# Altium PCB UKU100.PcbDoc (part 1 of 2)
Units mm, origin at the board's own origin, x right, y up, seen from the top; angles counter-clockwise.
Board outline 319.2 x 161.95 mm, 2 copper layers (Top Layer, Bottom Layer); 207 components, 325 nets, 756 pads, 514 vias.
Unrouted connection lines stored in the file: 5.
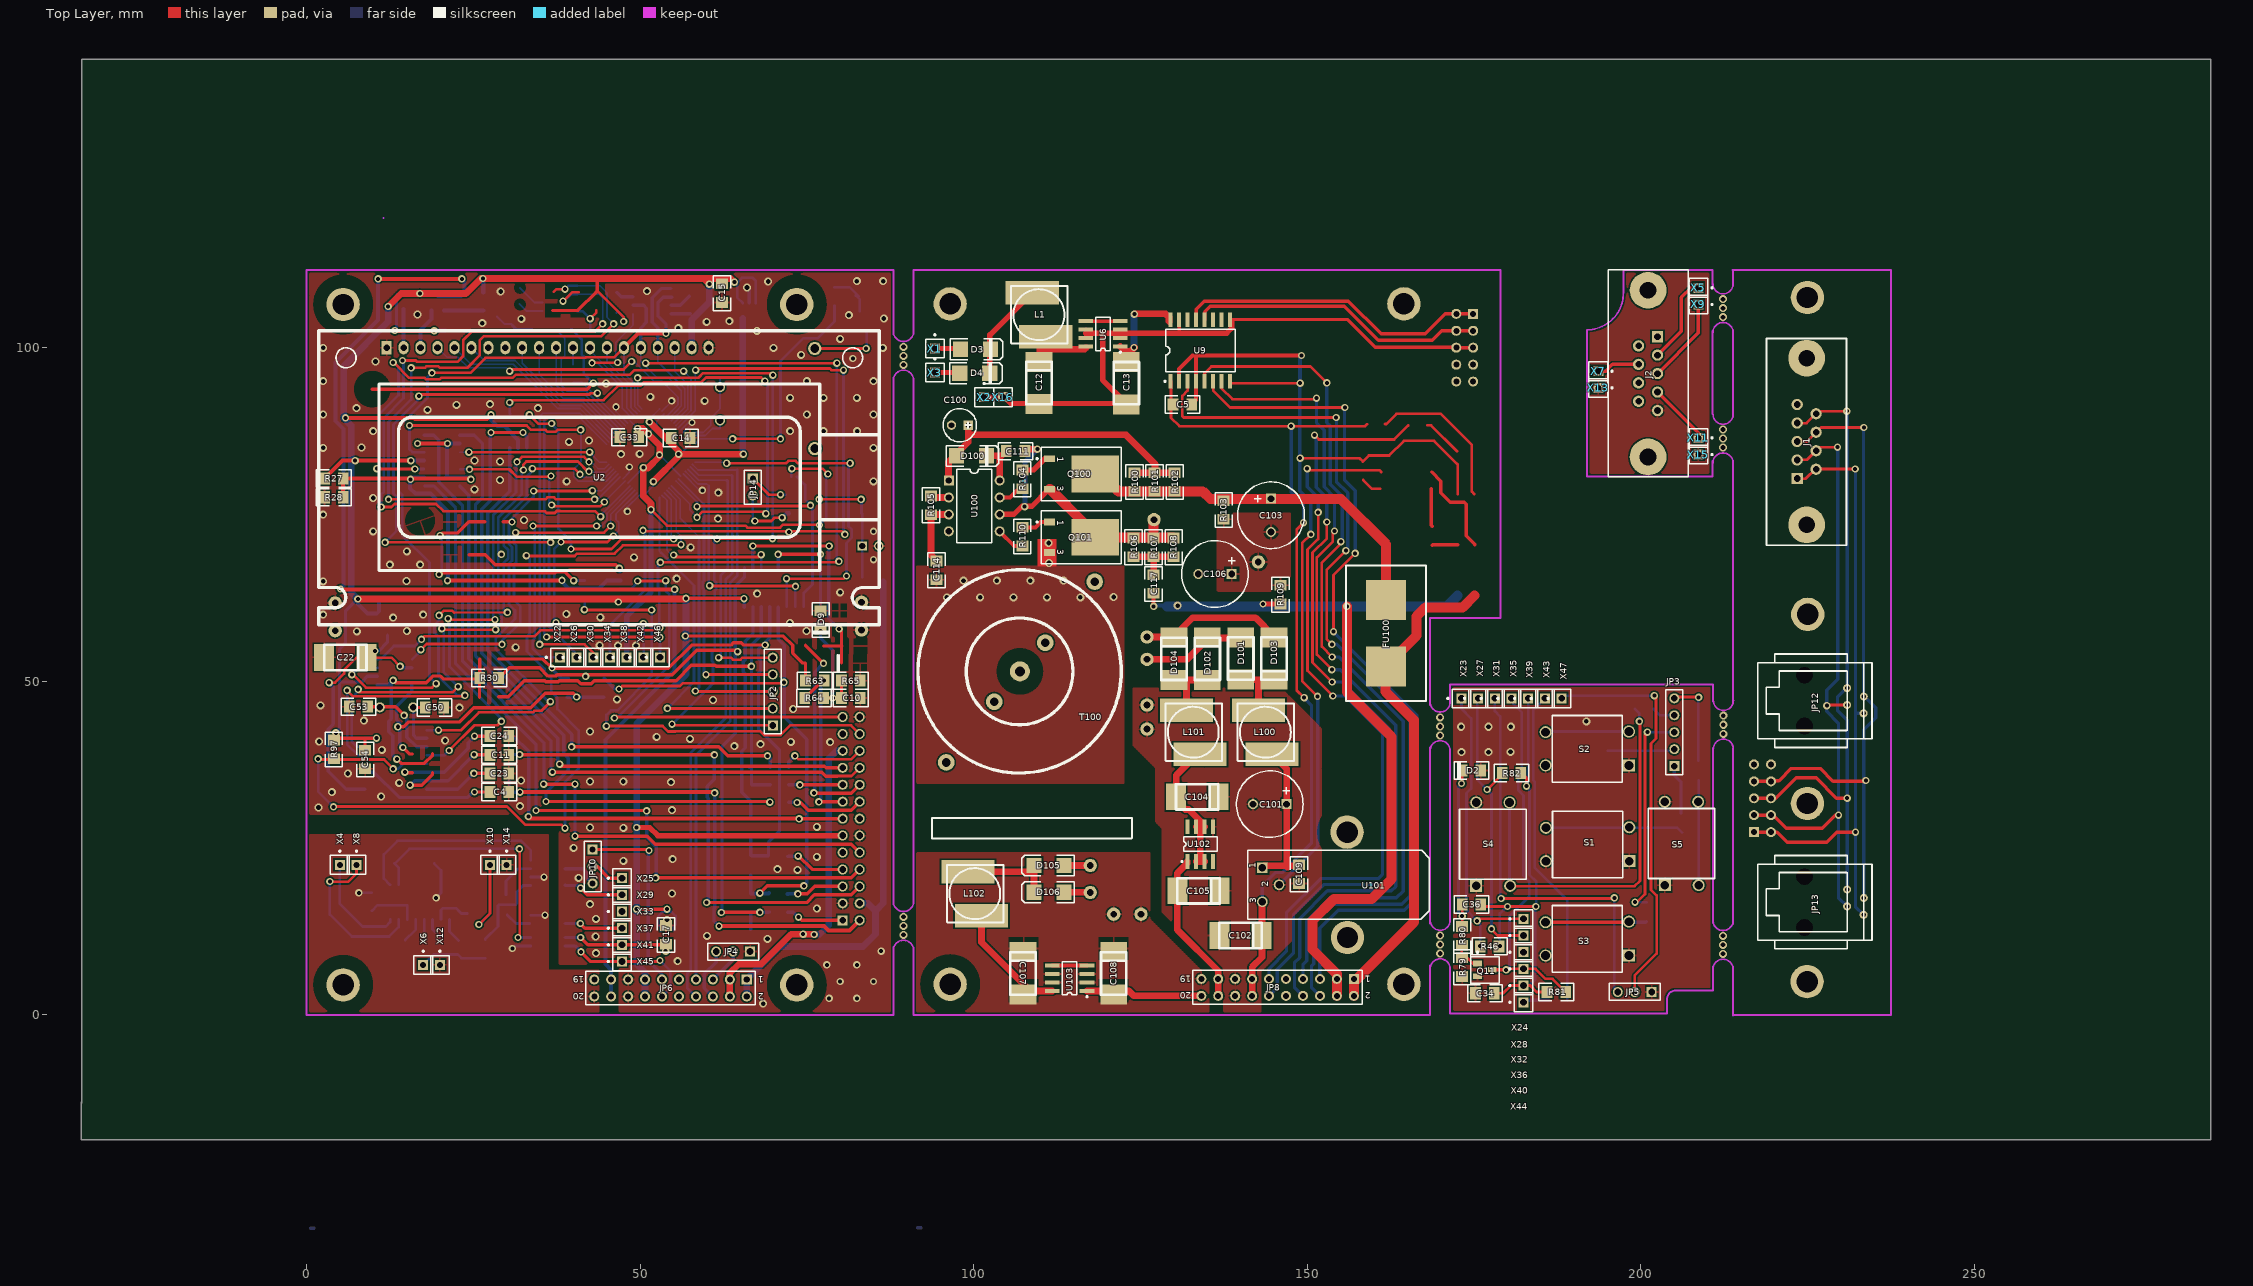
[diagram p0: Top Layer view]
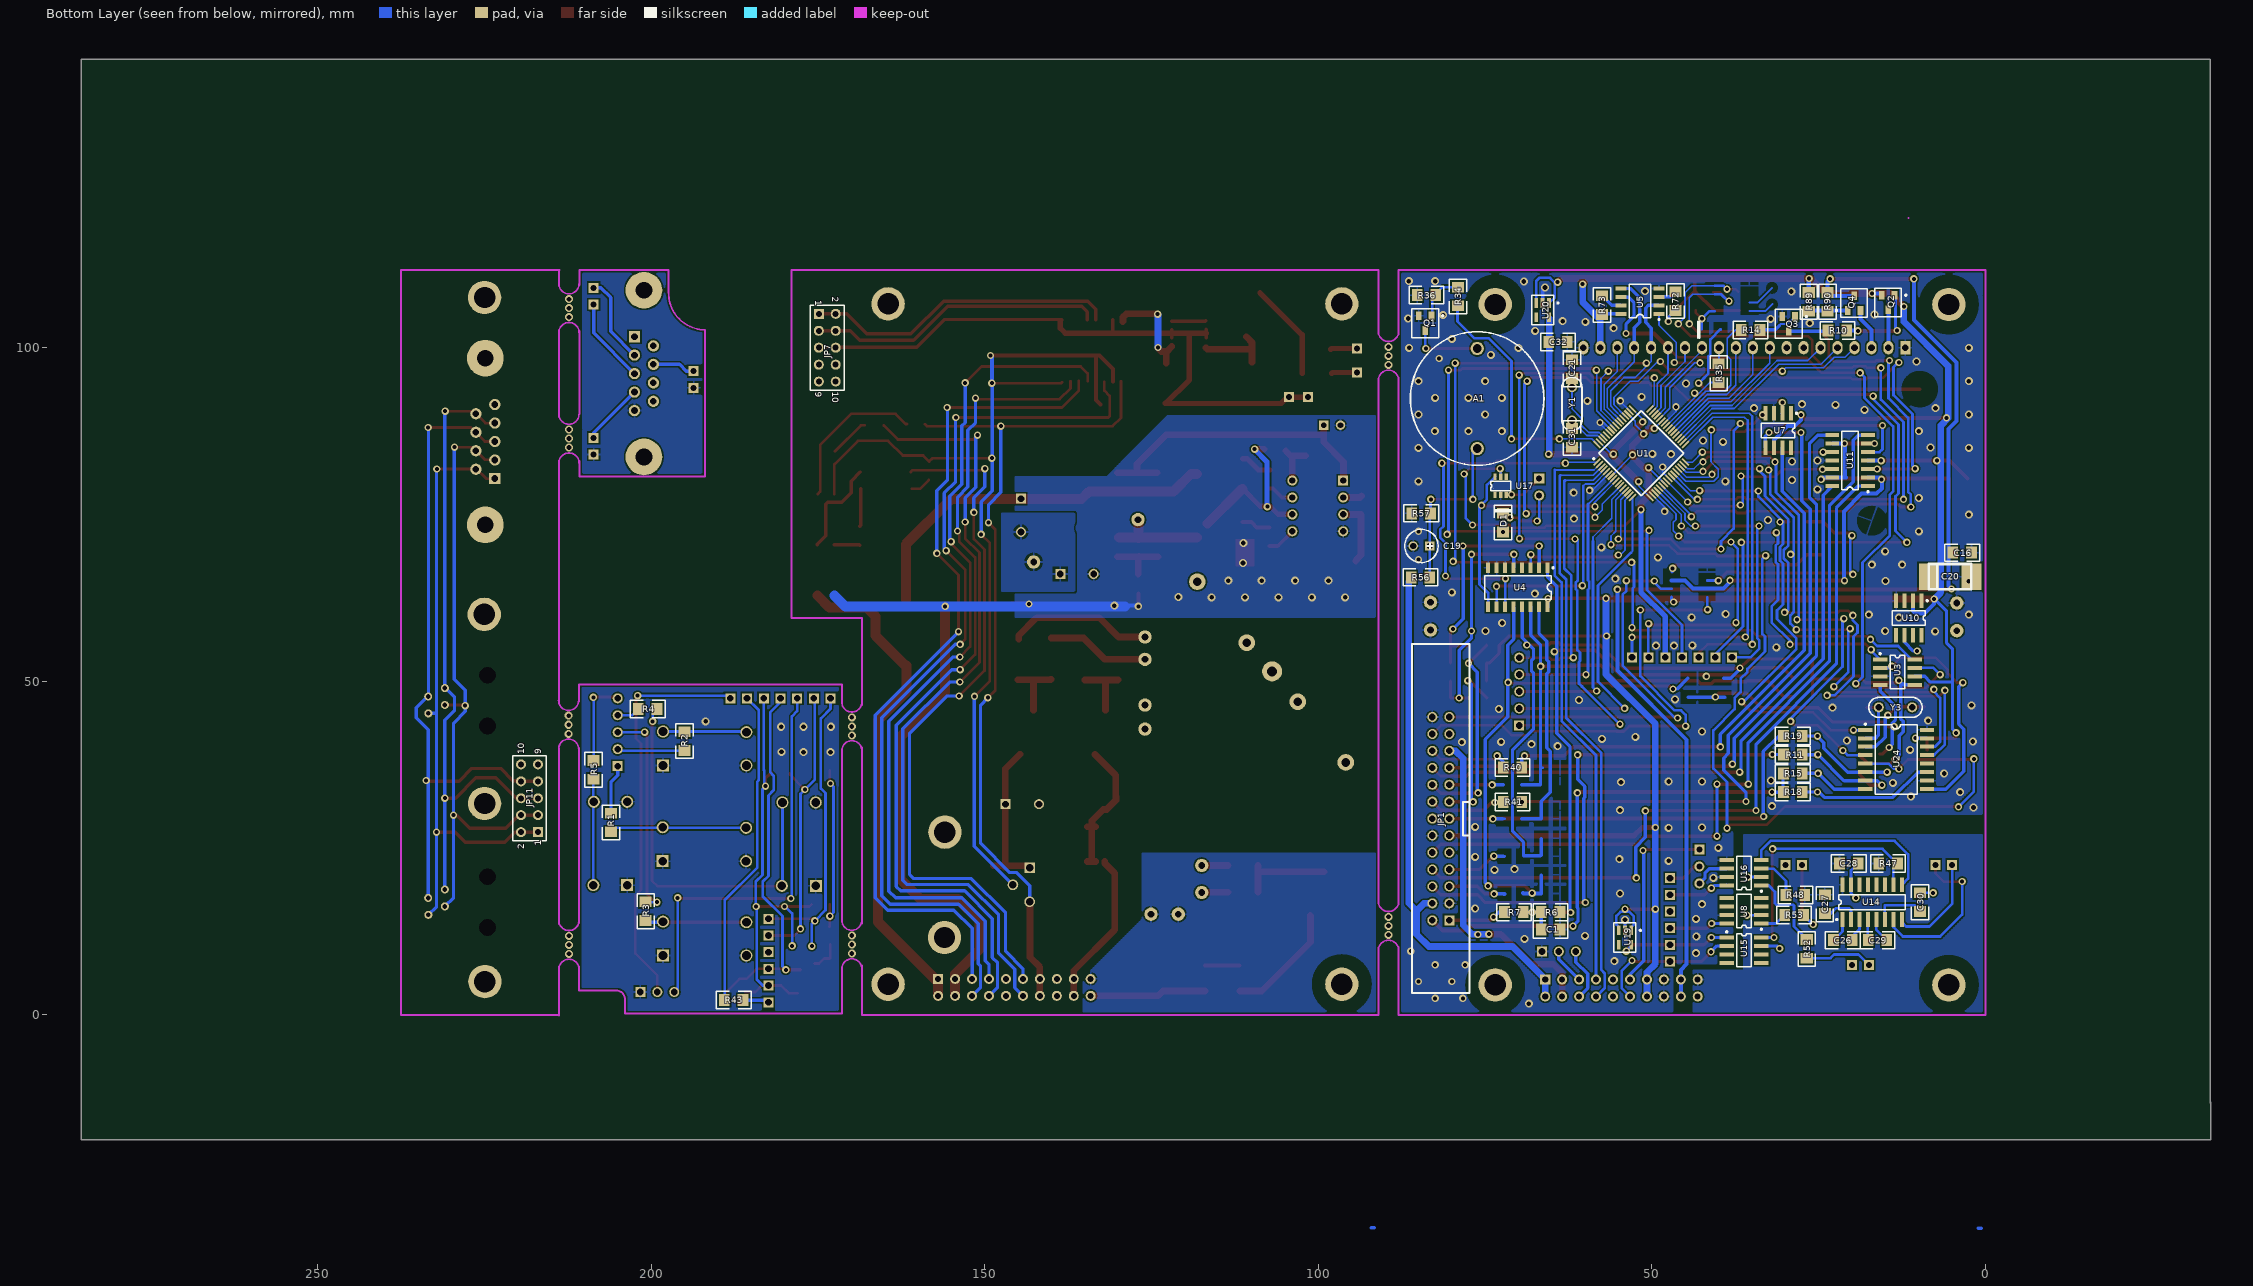
[diagram p1: Bottom Layer view, seen from below]

## Layer stack, top to bottom
Top Layer: signal copper 0.0356
Dielectric: dielectric 0.32, FR-4, Dk 4.8
Bottom Layer: signal copper 0.0356

## Board outline
-33.65,-13.25 -33.65,143.25 285.45,143.25 285.45,-18.7 -33.75,-18.7 -33.75,-13

## Design rules (kind name [scope] priority, off if disabled: settings)
Clearance Holes [InPoly vs HasPad('Free-0')] p1: gap=2
Clearance "Для LPC" [InComponent(U1)or
InNet(NetC21_2)or
InNet(NetC31_2)or
InNet(P0_0)or
InNet(P0_1)or
InNet(P0_2)or
InNet(P0_3)or
InNet(P0_4)or
InNet(P0_5)or
InNet(P0_6)or
InNet(P0_7)or
InNet(P0_8)or
InNet(P0_9)or
InNet(P0_10)or
InNet(P0_11)or
InNet(P0_12)or
InNet(P0_13)or
InNet(P0_14)or
InNet(P0_15)or
InNet(P0_16)or
InNet(P0_17)or
InNet(P0_18)or
InNet(P0_19)or
InNet(P0_20)or
InNet(P0_21)    or
InNet(P0_22)    or
InNet(P0_23)    or
InNet(P0_24)    or
InNet(P0_25)    or
InNet(P0_27)    or
InNet(P0_28)    or
InNet(P0_29)    or
InNet(P0_30)    or
InNet(P1_16)    or
InNet(P1_17)    or
InNet(P1_18)    or
InNet(P1_19)    or
InNet(P1_20)    or
InNet(P1_21)    or
InNet(P1_22)    or
InNet(P1_23)    or
InNet(P1_24)    or
InNet(P1_25)    or
InNet(P1_26)    or
InNet(P1_27)    or
InNet(P1_29)    or
InNet(P1_30)    or
InNet(P1_31)    or
InNet('+1V8')   or
InNet('+3V3')   or
(InNet(GND)and(not InPoly))      or
InNet(RES) vs InComponent(U1)or
InNet(NetC21_2)or
InNet(NetC31_2)or
InNet(P0_0)or
InNet(P0_1)or
InNet(P0_2)or
InNet(P0_3)or
InNet(P0_4)or
InNet(P0_5)or
InNet(P0_6)or
InNet(P0_7)or
InNet(P0_8)or
InNet(P0_9)or
InNet(P0_10)or
InNet(P0_11)or
InNet(P0_12)or
InNet(P0_13)or
InNet(P0_14)or
InNet(P0_15)or
InNet(P0_16)or
InNet(P0_17)or
InNet(P0_18)or
InNet(P0_19)or
InNet(P0_20)or
InNet(P0_21)    or
InNet(P0_22)    or
InNet(P0_23)    or
InNet(P0_24)    or
InNet(P0_25)    or
InNet(P0_27)    or
InNet(P0_28)    or
InNet(P0_29)    or
InNet(P0_30)    or
InNet(P1_16)    or
InNet(P1_17)    or
InNet(P1_18)    or
InNet(P1_19)    or
InNet(P1_20)    or
InNet(P1_21)    or
InNet(P1_22)    or
InNet(P1_23)    or
InNet(P1_24)    or
InNet(P1_25)    or
InNet(P1_26)    or
InNet(P1_27)    or
InNet(P1_29)    or
InNet(P1_30)    or
InNet(P1_31)    or
InNet('+1V8')   or
InNet('+3V3')   or
(InNet(GND)and(not InPoly))      or
InNet(RES)] p2: gap=0.1
Clearance [All] p3: gap=0.25
Clearance "Для разъёма и индикатора" [InComponent(JP1) or InComponent(U2)] p4: gap=0.3
Clearance Высоковольтное [InNet('+UOUT') or
InNet('U1') or
InNet('U2') or
InNet('UAKB') or
InNet('-UOUT') vs InPoly] p5: gap=0.6
Clearance Poly [InPoly] p6: gap=0.4
Clearance Poly_Poly [InPoly vs InPoly] p7: gap=1
Clearance Keep_Out [OnLayer('Keep-Out Layer')] p8: gap=0.7
ComponentClearance [All] p1: gap=0.254 collisioncheckmode=0
HoleSize [All] p1: absolutevalues=TRUE maxlimit=5 minlimit=0.025 maxpercent=80.000 minpercent=20.000
PolygonConnect [All] p1: connectstyle=Relief reliefconductorwidth=0.25 reliefentries=4 polygonreliefangle="90 Angle"
RoutingLayers [All] p1: top layer=Horizontal bottom layer=Vertical
RoutingVias [All] p1: holewidth=0.6 width=1.1 viastyle="Through Hole" minholewidth=0.6 minwidth=1.1 maxholewidth=0.7 maxwidth=1.2
SolderMaskExpansion [All] p1: expansion=0.102
TestPointUsage [All] p1: valid=0 allowmultiple=FALSE
Testpoint [All] p1: side=15 testpointundercomponent=TRUE minsize=1.016 maxsize=2.54 preferedsize=1.524 minholesize=0 maxholesize=1.016 preferedholesize=0.813 testpointgrid=0.025 style=1023 order=1234567890
Width [All] p1: maxlimit=2 minlimit=0.2 preferedwidth=0.254 toplayer_prefwidth=0.4 bottomlayer_prefwidth=0.5 minimp=50.000000 maximp=50.000000 favimp=50.000000
15 further rules are at their usual default settings.

## Classes and differential pairs
component class IBPV11: -IAKB A1 AIN3 AIN4 AIN4U AIN5 C0 C1 C4 C10 C11 C14 C15 C16 C17 C19 C20 C21 C22 C23 C24 C31 C32 C33 C34 C36 C50 C53 C54 D2 D9 I1+ I1- JP1 JP2 JP3 JP4 JP5 JP6 JP10 NetC25_1 NetC29_1 NetC29_2 NetC30_1 P0_19 Q1 Q2 Q3 Q4 Q11 R1 R2 R3 R4 R5 R6 R7 R10 R11 R14 R15 R18 R19 R34 R35 R36 R40 R41 R43 R46 R56 R57 R63 R64 R65 R79 R80 R81 R82 R89 R90 R97 S1 S2 S3 S4 S5 U1 U2 U4 U7 U10 U19 U20 U24 X22 X23 X24 X25 X26 X27 X28 X29 X30 X31 X32 X33 X34 X35 X36 X37 X38 X39 X40 X41 X42 X43 X44 X45 X46 X47 Y1 Y3
component class Designator: C5 C12 C13 C100 C101 C102 C103 C104 C105 C106 C107 C108 C109 C111 C114 C117 D3 D4 D100 D101 D102 D103 D104 D105 D106 FU100 J1 J4 JP7 JP8 JP11 JP12 JP13 L1 L100 L101 L102 Q100 Q101 R100 R101 R102 R103 R104 R105 R106 R107 R108 R109 R110 T100 U6 U9 U100 U101 U102 U103 X1 X2 X3 X16

## Components (designator, comment, footprint, x,y, rotation, side; value= is the part's Value field where it differs from the comment)
A1 "EFM-260" Pjezo15 76.2,97.4 r270 bottom
C1 "1.0" C3216-1206#1 65.2,12.8 r180 bottom (schematic designator C4)
C4 "1.0" _1206#1 28.9,33.4 r180 top
C5 "1.0" C3216-1206#1 131.3,91.5 r0 top (schematic designator C?)
C10 "1.0" C3216-1206#1 81.6,47.5 r0 top
C11 "1.0" C3216-1206#1 28.9,39 r180 top (schematic designator C?)
C12 "10.0x25 tantal" CAP_EL_6_3#1 109.8,97.9 r270 top (schematic designator C?)
C13 "10.0x25 tantal" CAP_EL_6_3#2 122.9,97.9 r270 top (schematic designator C?)
C14 "0.1" C3216-1206#1 56.1,86.5 r180 top
C15 "0.1" C3216-1206#2 62.3,108.2 r90 top
C16 "0.1" C3216-1206#2 3.5,69.3 r0 bottom
C17 "0.1" C3216-1206#1 53.9,12 r270 top
C19 "22.0x50" el3#1 83.3,70.3 r0 bottom
C20 "10.0x25 tantal" cap_el_6_3#1 8.5,65.7 r180 bottom (schematic designator C8)
C21 "15pF" C3216-1206#1 62,96.8 r270 bottom
C22 "10.0x25 tantal" cap_el_6_3#2 9,53.6 r180 top
C23 "1.0" C3216-1206#1 28.9,36.2 r180 top (schematic designator C?)
C24 "1.0" C3216-1206#1 28.9,41.8 r180 top
C26 "1.0" C3216-1206#1 21.4,11.2 r0 bottom (schematic designator C27)
C27 "1.0" _1206#2 24.1,16.6 r90 bottom (schematic designator C23)
C28 "1.0" C3216-1206#1 20.5,22.7 r180 bottom (schematic designator C24)
C29 "1.0" C3216-1206#1 16.2,11.2 r180 bottom (schematic designator C25)
C30 "1.0" C3216-1206#1 9.8,16.9 r90 bottom (schematic designator C26)
C31 "15pF" C3216-1206#1 62,86.5 r90 bottom
C32 "0.1" C3216-1206#1 64.1,100.9 r0 bottom
C33 "0.1" C3216-1206#2 48.4,86.6 r0 top
C34 "1.0" C3216-1206#1 176.65,3.25 r0 top
C36 "1.0" C3216-1206#1 174.65,16.55 r0 top
C50 "15pF" _1206#3 19.2,46.1 r180 top
C53 "15pF" _1206#3 7.8,46.2 r0 top
C54 "1.0" C3216-1206#1 8.8,38.3 r90 top
C100 "22.0x50" el3#2 99.2,88.4 r180 top (schematic designator C?)
C101 "220.0x25" el5 141.9,31.6 r0 top (schematic designator C1)
C102 "10.0x25 tantal" CAP_EL_6_3#3 143.2,11.9 r180 top (schematic designator C2)
C103 "220.0x63" el5 144.6,72.4 r90 top (schematic designator C?)
C104 "10.0x25 tantal" CAP_EL_6_3#3 136.7,32.7 r180 top (schematic designator C4)
C105 "10.0x25 tantal" CAP_EL_6_3#3 136.9,18.6 r180 top (schematic designator C5)
C106 "220.0x63" el5 133.7,66.1 r0 top (schematic designator C?)
C107 "10.0x25 tantal" CAP_EL_6_3#3 107.4,9.4 r270 top (schematic designator C8)
C108 "10.0x25 tantal" CAP_EL_6_3#3 121,9.4 r270 top (schematic designator C9)
C109 "0.1" C3216-1206#1 148.8,21.1 r90 top (schematic designator C10)
C111 "0.1" C3216-1206#1 106.3,84.5 r0 top (schematic designator C12)
C114 "1n0x1000" C3216-1206#1 94.45,66.65 r270 top (schematic designator C15)
C117 "1n0x1000" C3216-1206#1 127,64.6 r270 top (schematic designator C18)
D1 "LL4148" _1206D 72.3,73.8 r270 bottom
D2 "LL4148" _1206d#1 174.65,36.65 r0 top
D3 "10BQ060" DSO-C2/X2.3 100.3,99.8 r0 top (schematic designator D?)
D4 "10BQ060" DSO-C2/X2.3 100.2,96.2 r0 top (schematic designator D?)
D9 "BZV55-C5V6" _1206d#2 77.1,59.2 r90 top
D100 "10BQ060" DSO-C2/X2.3 99.7,83.8 r0 top (schematic designator D3)
D101 "10BQ060" D_6_3 140.05,50.25 r90 top (schematic designator D1)
D102 "10BQ060" D_6_3 135.05,56.55 r270 top (schematic designator D2)
D103 "10BQ060" D_6_3 145.05,50.25 r90 top (schematic designator D4)
D104 "10BQ060" D_6_3 130.05,56.55 r270 top (schematic designator D5)
D105 "10BQ060" DSO-C2/X2.3 111.3,22.4 r180 top (schematic designator D6)
D106 "10BQ060" DSO-C2/X2.3 111.3,18.4 r180 top (schematic designator D7)
FU100 "5.0A" FUSE2 161.8,57.2 r90 top (schematic designator FU1)
J1 "DBS-9M" DSUB_N9 223.35,85.9 r90 top
J2 "DBS-9M" DSUB_N9 202.65,96.2 r270 top (schematic designator J1)
JP1 "IDC-26" SCM-26 81.6,29.4 r90 bottom (schematic designator JP?)
JP2 "PLS-5" HDR1X5 69.9,43.4 r90 top (schematic designator JP3)
JP3 "PLS-5" HDR1X5 205.05,37.3 r90 top (schematic designator JP2)
JP4 "PLS-3" HDR1X3#1 66.5,9.5 r180 top (schematic designator JP?)
JP5 "PLS-3" HDR1X3#1 201.65,3.45 r180 top (schematic designator JP?)
JP6 "PBD20" HDR2X10 66,5.3 r180 top (schematic designator JP?)
JP7 "IDC10" HDR2X5 174.9,105.1 r270 bottom (schematic designator JP?)
JP8 "PLHD20" HDR2X10 157,5.4 r180 top
JP10 "PLS-3" HDR1X3#2 42.9,24.8 r270 top
JP11 "IDC10" HDR2X5 217,27.4 r90 bottom
JP12 "TJ3-4P4C" tj3-4p4c 233.45,47.1 r90 top
JP13 "TJ3-4P4C" tj3-4p4c 233.45,16.9 r90 top
JP14 "PLS-2" HDR1X2 66.9,80.4 r270 top
L1 "SDR0805-390KL" L10x10 104.7,99.9 r0 top (schematic designator L?)
L100 "SDR0805-390KL" L10X10 138.65,37.3 r0 top (schematic designator L1)
L101 "SDR0805-390KL" L10X10 127.85,37.3 r0 top (schematic designator L2)
L102 "SDR0805-390KL" L10X10 95.1,13.1 r0 top (schematic designator L3)
Q1 "BC846" SO-G3#1 84,103.7 r0 bottom
Q2 "BC856" SO-G3#2 14.6,106.8 r0 bottom
Q3 "BC846" SO-G3#2 29.5,103.6 r0 bottom
Q4 "BC856" SO-G3#1 19.7,106.7 r180 bottom
Q11 "BC846" SO-G3#1 176.65,6.75 r270 top
Q100 "IRFR120" SIP-G3/E8 114.8,81.1 r270 top (schematic designator Q?)
Q101 "IRFR120" SIP-G3/E8 114.8,71.6 r270 top (schematic designator Q?)
R1 "2K7" _1206#2 206.05,28.85 r90 bottom (schematic designator R3)
R2 "2K7" _1206#2 195.05,41.05 r270 bottom (schematic designator R4)
R3 "2K7" _1206#2 200.85,15.55 r90 bottom (schematic designator R6)
R4 "2K7" _1206#2 200.55,45.85 r0 bottom (schematic designator R7)
R5 "2K7" _1206#2 208.65,36.75 r90 bottom (schematic designator R9)
R6 "2K7" _1206#2 65.2,15.4 r180 bottom (schematic designator R10)
R7 "33K" _1206#2 70.7,15.4 r0 bottom (schematic designator R11)
R10 "1K0" _1206#1 22.2,102.6 r180 bottom
R11 "K10" _1206#1 28.9,39 r0 bottom (schematic designator R?)
R14 "1K0" _1206#1 35.2,102.7 r180 bottom
R15 "K10" _1206#1 28.9,36.2 r0 bottom (schematic designator R?)
R18 "K10" _1206#1 28.9,33.4 r0 bottom
R19 "K10" _1206#1 28.9,41.8 r0 bottom
R27 "2K7" _1206#3 4.1,80.4 r0 top
R28 "1K0" _1206#3 4.1,77.6 r0 top
R30 "10R" _1206#3 27.4,50.5 r180 top
R34 "1K0" _1206#2 79.1,107.7 r90 bottom (schematic designator R36)
R35 "10K" _1206#2 40,96.2 r90 bottom
R36 "10K" _1206#2 83.8,107.9 r180 bottom (schematic designator R16)
R40 "K10" _1206#2 70.9,37.1 r180 bottom (schematic designator R42)
R41 "K10" _1206#2 70.9,31.9 r180 bottom (schematic designator R20)
R43 "K20" _1206#2 187.65,2.25 r180 bottom (schematic designator R42)
R46 "1K0" _1206#4 177.4,10.3 r0 top
R47 "1K0" _1206#2 14.6,22.7 r180 bottom (schematic designator R65)
R48 "K20" _1206#2 28.5,18 r180 bottom (schematic designator R45)
R52 "1K0" _1206#2 26.8,9.9 r270 bottom (schematic designator R67)
R53 "1K0" _1206#2 28.7,15 r180 bottom (schematic designator R68)
R56 "10K" _1206#2 84.7,65.6 r0 bottom
R57 "2K7" _1206#2 84.6,75.2 r180 bottom
R63 "1K0" _1206#3 76.2,50.1 r180 top
R64 "2K7" _1206#3 76.1,47.5 r0 top
R65 "10K" _1206#3 81.6,50.1 r180 top
R72 "2K7" _1206#2 46.5,107 r270 bottom
R73 "2K7" _1206#2 57.5,106.4 r90 bottom
R79 "10K" _1206#2 173.25,7.15 r90 top
R80 "10K" _1206#2 173.25,11.85 r90 top
R81 "10K" _1206#2 187.35,3.45 r0 top (schematic designator R?)
R82 "10K" _1206#2 180.65,36.25 r180 top
R89 "7K5" _1206#2 26.5,106.9 r90 bottom
R90 "2K2" _1206#2 23.7,106.9 r270 bottom
R97 "1K0" _1206#3 4.1,39.8 r90 top
R100 "7K5" _1206#2 124.149,79.9 r90 top (schematic designator R1)
R101 "7K5" _1206#2 127.15,79.9 r90 top (schematic designator R2)
R102 "7K5" _1206#2 130.15,79.9 r90 top (schematic designator R3)
R103 "20K" _1206#2 137.5,75.7 r270 top (schematic designator R4)
R104 "22R" _1206#2 107.3,80.3 r90 top (schematic designator R5)
R105 "15K" _1206#2 93.6,76.4 r90 top (schematic designator R6)
R106 "30R" _1206#2 124,70.1 r270 top (schematic designator R9)
R107 "30R" _1206#2 127,70.1 r270 top (schematic designator R8)
R108 "30R" _1206#2 130,70.1 r270 top (schematic designator R7)
R109 "20K" _1206#2 146,63 r270 top (schematic designator R10)
R110 "22R" _1206#2 107.3,71.7 r90 top (schematic designator R11)
S1 "SWT-9" SWT-9 198.3,23.05 r180 top
S2 "SWT-9" SWT-9 198.25,37.4 r180 top
S3 "SWT-9" SWT-9 198.25,8.9 r180 top
S4 "SWT-9" SWT-9 175.35,19.35 r90 top
S5 "SWT-9" SWT-9 203.62,19.45 r90 top
T100 "TRANS_RING1" trans_ring1 106.9,51.5 r180 top (schematic designator T1)
U1 "LPC2129FBD64" F-QFP10X10-G64/P.5N 51.6,84.2 r135 bottom
U2 "AG1232G" AG1232G 43.9,80.6 r0 top (schematic designator U4)
U3 "TLV2542" SO-G8 13.2,51.4 r270 bottom (schematic designator U6)
U4 "MC14051BD" SO-G16/C5.85 70.1,64.1 r0 bottom
U5 "25LC640" SO-G8/D5 51.8,107 r90 bottom
U6 "MC78L05ACD" SO-G8 119.4,102.1 r90 top (schematic designator U?)
U7 "UCC37324" SO-G8 31.1,87.6 r0 bottom
U8 "MOCD217" SO-G8 36.2,15.6 r90 bottom
U9 "ADM2483" SO-G16/D10.4 134,99.6 r0 top (schematic designator U?)
U10 "REF198GS" SO-G8 11.5,59.5 r0 bottom
U11 "LM324AD" SO-G14/G3.3 20.3,83.1 r90 bottom
U14 "MAX232ESE" SO-G16 17,16.9 r180 bottom
U15 "MOCD217" SO-G8 36.2,9.7 r270 bottom
U16 "MOCD217" SO-G8 36.2,21.3 r90 bottom
U17 "PIC10F200/202" "SOT23 - 6" 72.7,79.3 r180 bottom
U19 "TPS76333" SO-G5/P.95 54.05,11.6 r0 bottom
U20 "TPS76318" SO-G5/P.95 66.4,105.65 r0 bottom
U24 "AD7705" SO-G16/D10.4 13.4,38.3 r270 bottom
U100 "IR2155" DIP-8/D11 100.1,76.3 r270 top (schematic designator U?)
U101 "7805" 7805_1 143.3,19.5 r270 top (schematic designator U1)
U102 "L79L05ACD" SO-G8 134,25.6 r0 top (schematic designator U3)
U103 "MC78L05ACD" SO-G8 114.4,5.5 r90 top (schematic designator U4)
X1 "" PIN1#1 94.2,99.9 r0 top (schematic designator X?)
X2 "" PIN1#1 101.6,92.6 r0 top (schematic designator X?)
X3 "" PIN1#1 94.2,96.3 r0 top (schematic designator X?)
X4 "" PIN1#1 5,22.5 r0 top (schematic designator X?)
X5 "" PIN1#1 208.65,109 r270 top (schematic designator X?)
X6 "" PIN1#1 17.5,7.5 r0 top (schematic designator X?)
X7 "" PIN1#1 193.65,96.5 r270 top (schematic designator X?)
X8 "" PIN1#1 7.5,22.5 r0 top (schematic designator X?)
X9 "" PIN1#1 208.65,106.5 r270 top (schematic designator X?)
X10 "" PIN1#1 27.5,22.5 r0 top (schematic designator X?)
X11 "" PIN1#1 208.65,86.5 r270 top (schematic designator X?)
X12 "" PIN1#1 20,7.5 r0 top (schematic designator X?)
X13 "" PIN1#1 193.65,94 r270 top (schematic designator X?)
X14 "" PIN1#1 30,22.5 r0 top
X15 "" PIN1#1 208.65,84 r270 top
X16 "" PIN1#1 104.4,92.6 r90 top
X22 "" PIN1#2 38,53.6 r90 top
X23 "" PIN1#2 173.15,47.45 r90 top
X24 "" PIN1#2 182.45,14.4 r90 top
X25 "" PIN1#2 47.3,20.5 r90 top
X26 "" PIN1#2 40.5,53.6 r90 top
X27 "" PIN1#2 175.65,47.45 r90 top
X28 "" PIN1#2 182.45,11.9 r90 top
X29 "" PIN1#2 47.3,18 r90 top
X30 "" PIN1#2 43,53.6 r90 top
X31 "" PIN1#2 178.15,47.45 r90 top
X32 "" PIN1#2 182.45,9.4 r90 top
X33 "" PIN1#2 47.3,15.5 r90 top
X34 "" PIN1#2 45.5,53.6 r90 top
X35 "" PIN1#2 180.65,47.45 r90 top
X36 "" PIN1#2 182.45,6.9 r90 top
X37 "" PIN1#2 47.3,13 r90 top
X38 "" PIN1#2 48,53.6 r90 top
X39 "" PIN1#2 183.15,47.45 r90 top
X40 "" PIN1#2 182.45,4.4 r90 top
X41 "" PIN1#2 47.3,10.5 r90 top
X42 "" PIN1#2 50.5,53.6 r90 top
X43 "" PIN1#2 185.65,47.45 r90 top
X44 "" PIN1#2 182.45,1.9 r90 top
X45 "" PIN1#2 47.3,8 r90 top
X46 "" PIN1#2 53,53.6 r90 top
X47 "" PIN1#2 188.15,47.45 r90 top
Y1 "10MGz" QWARZ1#1 62,94.1 r270 bottom
Y3 "4,9152MGz" QWARZ1#2 16,46.1 r180 bottom (schematic designator Y?)

## Footprints (in the part's own frame and the unit in brackets; to place one, negate y for a bottom-side part, rotate by r counter-clockwise, add the part's x,y. Pads: shape width x height; smd on the part's side, far side on the other; paste and mask are expansions set on the pad)
7805_1 [mm]
  rect 1.6x1.6 hole 1.1: 1(-2.54,0)
  round 1.6 hole 1.1: 2(0,2.5) 3(2.54,0)
  silkscreen extent -5.15,-2.2 5.15,25
_1206#1 [mm]
  rect 1.6x1.8 smd: 1(-1.412,-0.007) 2(1.388,-0.007)
  silkscreen extent -2.61,-1.31 2.59,1.29
_1206#2 [mm]
  rect 1.6x1.8 smd: 1(-1.4,0) 2(1.4,0)
  silkscreen extent -2.6,-1.3 2.6,1.3
_1206#3 [mm]
  rect 1.6x1.8 smd: 1(-1.397,0.003) 2(1.403,0.003)
  silkscreen extent -2.6,-1.3 2.6,1.3
_1206#4 [mm]
  rect 1.6x1.8 smd: 1(-1.421,-0.006) 2(1.379,-0.006)
  silkscreen extent -2.62,-1.31 2.58,1.29
_1206D [mm]
  rect 1.6x1.8 smd: 1(1.395,-0.009) 2(-1.405,-0.009)
  silkscreen extent -2.6,-1.31 2.6,1.29
_1206d#1 [mm]
  rect 1.6x1.8 smd: 1(1.4,0) 2(-1.4,0)
  silkscreen extent -2.6,-1.3 2.6,1.3
_1206d#2 [mm]
  rect 1.6x1.8 smd: 1(1.405,0.012) 2(-1.395,0.012)
  silkscreen extent -2.6,-1.29 2.6,1.31
AG1232G [mm]
  rect 1.5x2 hole 1: 1(-31.877,19.431)
  oval 1.5x2 hole 1: 2(-29.337,19.431) 3(-26.797,19.431) 4(-24.257,19.431) 5(-21.717,19.431) 6(-19.177,19.431) 7(-16.637,19.431) 8(-14.097,19.431) 9(-11.557,19.431) 10(-9.017,19.431) 11(-6.477,19.431) 12(-3.937,19.431) 13(-1.397,19.431) 14(1.143,19.431) 15(3.683,19.431) 16(6.223,19.431) 17(8.763,19.431) 18(11.303,19.431) 19(13.843,19.431) 20(16.383,19.431)
  silkscreen extent -42.04,-22.1 41.96,21.97
C3216-1206#1 [mm]
  rect 1.6x1.8 smd: 1(-1.4,0) 2(1.4,0)
  silkscreen extent -2.6,-1.3 2.6,1.3
C3216-1206#2 [mm]
  rect 1.6x1.8 smd: 1(-1.402,0.006) 2(1.398,0.006)
  silkscreen extent -2.6,-1.29 2.6,1.31
CAP_EL_6_3#1 [mm]
  rect 3x4 smd: 1(-0.011,0.006) 2(6.339,0.006)
  silkscreen extent -0.01,-1.9 6.34,1.91
CAP_EL_6_3#2 [mm]
  rect 3x4 smd: 1(0.011,-0.002) 2(6.361,-0.002)
  silkscreen extent 0.01,-1.91 6.36,1.9
CAP_EL_6_3#3 [mm]
  rect 3x4 smd: 1(0,0) 2(6.35,0)
  silkscreen extent 0,-1.91 6.35,1.91
cap_el_6_3#1 [mm]
  rect 3x4 smd: 1(0.011,-0.002) 2(6.361,-0.002)
  silkscreen extent 0.01,-1.91 6.36,1.9
cap_el_6_3#2 [mm]
  rect 3x4 smd: 1(-0.011,0.006) 2(6.339,0.006)
  silkscreen extent -0.01,-1.9 6.34,1.91
D_6_3 [mm]
  rect 3x4 smd: 1(6.35,0) 2(0,0)
  silkscreen extent 0,-1.91 6.35,1.91
DIP-8/D11 [mm]
  rect 1.5x1.5 hole 0.95: 1(-3.81,-3.81)
  round 1.5 hole 0.95: 2(-1.27,-3.81) 3(1.27,-3.81) 4(3.81,-3.81) 5(3.81,3.81) 6(1.27,3.81) 7(-1.27,3.81) 8(-3.81,3.81)
  silkscreen extent -5.5,-2.65 5.5,2.65
DSO-C2/X2.3 [mm]
  rect 2.3x2.3 smd: 1(-2.25,0) 2(2.25,0)
  silkscreen extent -3.8,-1.55 4.1,1.55
DSUB_N9 [mm]
  rect 1.69x1.69 hole 1: 1(-5.481,-0.116)
  round 1.69 hole 1: 2(-2.711,-0.116) 3(0.059,-0.116) 4(2.829,-0.116) 5(5.599,-0.116) 6(-4.096,-2.956) 7(-1.326,-2.956) 8(1.444,-2.956) 9(4.214,-2.956)
  round 5.5 hole 2.5: 10(-12.436,-1.536) 11(12.554,-1.536)
  silkscreen extent -15.49,-7.51 15.51,4.49
el3#1 [mm]
  rect 1.4x1.4 hole 0.95: 1(0,0)
  round 1.4 hole 0.95: 2(2.5,0)
  silkscreen extent -1.25,-2.5 3.75,2.5
el3#2 [mm]
  rect 1.4x1.4 hole 0.85: 1(0.011,-0.008)
  round 1.4 hole 0.85: 2(2.511,-0.008)
  silkscreen extent -1.24,-2.51 3.76,2.49
el5 [mm]
  rect 1.5x1.5 hole 1: 1(5,0)
  round 1.5 hole 1: 2(0,0)
  silkscreen extent -2.5,-5 7.5,5
F-QFP10X10-G64/P.5N [mm]
  rect 1.45x0.3 smd: 1(-5.625,3.75) 2(-5.625,3.25) 3(-5.625,2.75) 4(-5.625,2.25) 5(-5.625,1.75) 6(-5.625,1.25) 7(-5.625,0.75) 8(-5.625,0.25) 9(-5.625,-0.25) 10(-5.625,-0.75) 11(-5.625,-1.25) 12(-5.625,-1.75) 13(-5.625,-2.25) 14(-5.625,-2.75) 15(-5.625,-3.25) 16(-5.625,-3.75) 33(5.625,-3.75) 34(5.625,-3.25) 35(5.625,-2.75) 36(5.625,-2.25) 37(5.625,-1.75) 38(5.625,-1.25) 39(5.625,-0.75) 40(5.625,-0.25) 41(5.625,0.25) 42(5.625,0.75) 43(5.625,1.25) 44(5.625,1.75) 45(5.625,2.25) 46(5.625,2.75) 47(5.625,3.25) 48(5.625,3.75)
  rect 0.3x1.45 smd: 17(-3.75,-5.625) 18(-3.25,-5.625) 19(-2.75,-5.625) 20(-2.25,-5.625) 21(-1.75,-5.625) 22(-1.25,-5.625) 23(-0.75,-5.625) 24(-0.25,-5.625) 25(0.25,-5.625) 26(0.75,-5.625) 27(1.25,-5.625) 28(1.75,-5.625) 29(2.25,-5.625) 30(2.75,-5.625) 31(3.25,-5.625) 32(3.75,-5.625) 49(3.75,5.625) 50(3.25,5.625) 51(2.75,5.625) 52(2.25,5.625) 53(1.75,5.625) 54(1.25,5.625) 55(0.75,5.625) 56(0.25,5.625) 57(-0.25,5.625) 58(-0.75,5.625) 59(-1.25,5.625) 60(-1.75,5.625) 61(-2.25,5.625) 62(-2.75,5.625) 63(-3.25,5.625) 64(-3.75,5.625)
  silkscreen extent -5.75,-4.5 4.5,4.57
FUSE2 [mm]
  rect 6x6 smd: 1(-5,0) 2(5,0)
  silkscreen extent -10.16,-6 10.16,6
HDR1X2 [mm]
  rect 1.5x1.5 hole 0.9: 1(0,0)
  round 1.5 hole 0.9: 2(2.54,0)
  silkscreen extent -1.27,-1.27 3.81,1.27
HDR1X3#1 [mm]
  rect 1.5x1.5 hole 1: 1(0,0)
  round 1.5 hole 1: 2(2.54,0) 3(5.08,0)
  silkscreen extent -1.27,-1.27 6.35,1.27
HDR1X3#2 [mm]
  rect 1.5x1.5 hole 0.9: 1(0,0)
  round 1.5 hole 0.9: 2(2.54,0) 3(5.08,0)
  silkscreen extent -1.27,-1.27 6.35,1.27
HDR1X5 [mm]
  rect 1.5x1.5 hole 1: 1(0,0)
  round 1.5 hole 1: 2(2.54,0) 3(5.08,0) 4(7.62,0) 5(10.16,0)
  silkscreen extent -1.27,-1.27 11.43,1.27
HDR2X5 [mm]
  rect 1.5x1.5 hole 0.9: 1(0,0)
  round 1.5 hole 0.9: 2(0,2.54) 3(2.54,0) 4(2.54,2.54) 5(5.08,0) 6(5.08,2.54) 7(7.62,0) 8(7.62,2.54) 9(10.16,0) 10(10.16,2.54)
  silkscreen extent -1.27,-1.27 11.43,3.81
HDR2X10 [mm]
  rect 1.5x1.5 hole 0.9: 1(0,0)
  round 1.5 hole 0.9: 2(0,2.54) 3(2.54,0) 4(2.54,2.54) 5(5.08,0) 6(5.08,2.54) 7(7.62,0) 8(7.62,2.54) 9(10.16,0) 10(10.16,2.54) 11(12.7,0) 12(12.7,2.54) 13(15.24,0) 14(15.24,2.54) 15(17.78,0) 16(17.78,2.54) 17(20.32,0) 18(20.32,2.54) 19(22.86,0) 20(22.86,2.54)
  silkscreen extent -1.27,-1.27 24.13,3.81
L10x10 [mm]
  rect 8x3.5 smd: 1(4.075,8.372) 2(6.107,1.768)
  silkscreen extent 0.9,0.75 9.41,9.39
L10X10 [mm]
  rect 8x3.5 smd: 1(4.064,8.382) 2(6.096,1.778)
  silkscreen extent 0.89,0.76 9.4,9.4
PIN1#1 [mm]
  rect 1.5x1.5 hole 0.9: 1(0,0)
  silkscreen extent -1.4,-1.4 1.4,2.17
PIN1#2 [mm]
  rect 1.5x1.5 hole 1: 1(0,0)
  silkscreen extent -1.4,-1.4 1.4,2.17
Pjezo15 [mm]
  round 2 hole 1.3: 1(-2.5,0) 2(12.5,0)
  silkscreen extent -5.01,-10.01 15.01,10.01
QWARZ1#1 [mm]
  round 1.5 hole 1: 1(0,0) 2(5,0)
  silkscreen extent -1.5,-1.5 6.5,1.5
QWARZ1#2 [mm]
  round 1.5 hole 1: 1(0.004,0.011) 2(5.004,0.011)
  silkscreen extent -1.49,-1.49 6.5,1.51
SCM-26 [mm]
  rect 1.5x1.5 hole 1: 1(-15.215,-1.22)
  round 1.5 hole 1: 2(-15.215,1.32) 3(-12.675,-1.22) 4(-12.675,1.32) 5(-10.135,-1.22) 6(-10.135,1.32) 7(-7.595,-1.22) 8(-7.595,1.32) 9(-5.055,-1.22) 10(-5.055,1.32) 11(-2.515,-1.22) 12(-2.515,1.32) 13(0.025,-1.22) 14(0.025,1.32) 15(2.565,-1.22) 16(2.565,1.32) 17(5.105,-1.22) 18(5.1,1.325) 19(7.645,-1.22) 20(7.645,1.32) 21(10.185,-1.22) 22(10.185,1.32) 23(12.725,-1.22) 24(12.725,1.32) 25(15.265,-1.22) 26(15.25,1.325)
  silkscreen extent -26.13,-4.25 26.19,4.35
SIP-G3/E8 [mm]
  rect 1x1.6 smd: 1(-2.285,-3.425) 3(2.285,-3.425)
  rect 5.5x7.1 smd: 4(0,3.425)
  silkscreen extent -4,-5.4 4,7.38
SO-G3#1 [mm]
  rect 0.85x1.3 smd: 1(-0.95,-1.1) 2(0.95,-1.1) 3(0,1.1)
  silkscreen extent -2.77,-2.15 2,2.15
SO-G3#2 [mm]
  rect 0.85x1.3 smd: 1(-0.948,-1.102) 2(0.952,-1.102) 3(0.002,1.098)
  silkscreen extent -2.77,-2.15 2,2.15
SO-G5/P.95 [mm]
  rect 0.55x1.45 smd: 1(-0.95,-1.075) 2(0,-1.075) 3(0.95,-1.075) 4(0.95,1.075) 5(-0.95,1.075)
  silkscreen extent -2.42,-2.2 1.65,2.2
SO-G8 [mm]
  rect 0.6x2.2 smd: 1(-1.905,-2.6) 2(-0.635,-2.6) 3(0.635,-2.6) 4(1.905,-2.6) 5(1.905,2.6) 6(0.635,2.6) 7(-0.635,2.6) 8(-1.905,2.6)
  silkscreen extent -2.88,-2.72 2.5,1.1
SO-G8/D5 [mm]
  rect 0.6x1.7 smd: 1(-1.905,-2.85) 2(-0.635,-2.85) 3(0.635,-2.85) 4(1.905,-2.85) 5(1.905,2.85) 6(0.635,2.85) 7(-0.635,2.85) 8(-1.905,2.85)
  silkscreen extent -2.88,-2.97 2.5,1.6
SO-G14/G3.3 [mm]
  rect 0.6x2.05 smd: 1(-3.81,-2.675) 2(-2.54,-2.675) 3(-1.27,-2.675) 4(0,-2.675) 5(1.27,-2.675) 6(2.54,-2.675) 7(3.81,-2.675) 8(3.81,2.675) 9(2.54,2.675) 10(1.27,2.675) 11(0,2.675) 12(-1.27,2.675) 13(-2.54,2.675) 14(-3.81,2.675)
  silkscreen extent -4.78,-2.8 4.38,1.25
SO-G16 [mm]
  rect 0.6x2.2 smd: 1(-4.445,-2.6) 2(-3.175,-2.6) 3(-1.905,-2.6) 4(-0.635,-2.6) 5(0.635,-2.6) 6(1.905,-2.6) 7(3.175,-2.6) 8(4.445,-2.6) 9(4.445,2.6) 10(3.175,2.6) 11(1.905,2.6) 12(0.635,2.6) 13(-0.635,2.6) 14(-1.905,2.6) 15(-3.175,2.6) 16(-4.445,2.6)
  silkscreen extent -5.42,-2.72 5,1.1
SO-G16/C5.85 [mm]
  rect 0.6x1.55 smd: 1(-4.445,-2.925) 2(-3.175,-2.925) 3(-1.905,-2.925) 4(-0.635,-2.925) 5(0.635,-2.925) 6(1.905,-2.925) 7(3.175,-2.925) 8(4.445,-2.925) 9(4.445,2.925) 10(3.175,2.925) 11(1.905,2.925) 12(0.635,2.925) 13(-0.635,2.925) 14(-1.905,2.925) 15(-3.175,2.925) 16(-4.445,2.925)
  silkscreen extent -5.39,-3.05 5,1.75
SO-G16/D10.4 [mm]
  rect 0.6x2.15 smd: 1(-4.445,-4.625) 2(-3.175,-4.625) 3(-1.905,-4.625) 4(-0.635,-4.625) 5(0.635,-4.625) 6(1.905,-4.625) 7(3.175,-4.625) 8(4.445,-4.625) 9(4.445,4.625) 10(3.175,4.625) 11(1.905,4.625) 12(0.635,4.625) 13(-0.635,4.625) 14(-1.905,4.625) 15(-3.175,4.625) 16(-4.445,4.625)
  silkscreen extent -5.42,-4.75 5.2,3.15
"SOT23 - 6" [mm]
  rect 0.5x1 smd: 1(-0.835,-1.337) 2(0.015,-1.337) 3(0.865,-1.337) 4(0.865,1.363) 5(0.015,1.363) 6(-0.835,1.363)
  silkscreen extent -1.48,-0.71 1.52,0.74
SWT-9 [mm]
  rect 1.8x1.8 hole 1.3: 1(0,0)
  round 1.8 hole 1.3: 1(12.5,0) 2(0,-5.08) 2(12.5,-5)
  silkscreen extent 1,-7.5 11.5,2.5
tj3-4p4c [mm]
  round 1.2 hole 0.7: 1(-1.9,0.025) 2(-0.635,2.5) 3(0.635,0) 4(1.9,2.5)
  round 1.2 hole 2.5: 5(-3.8,8.9) 6(3.8,8.9)
  silkscreen extent -7,-1.22 7,15.88
trans_ring1 [mm]
  round 2 hole 1: 1(-35.8,-16.4) 2(-20.15,-22.75) 3(-19.1,-1.8) 4(-19.1,8.65) 5(-19.1,5.05) 6(-19.1,-5.15) 8(-14.1,36.4) 9(-18.2,36.4) 10(-10.6,33.15)
  round 2 hole 1 unplated: 7(-10.6,29.1)
  silkscreen extent -15.24,-15.24 15.24,15.24

## Part data
A1: library part PJEZ0
C1 C4 C5 C10 C11 C14 C15 C16 C17 C21 C23 C24 C26 C27 C28 C29 C30 C31 C32 C33 C34 C36 C109 C111 C114 C117: library part "Cap Semi", "Capacitor (Semiconductor SIM Model)"
C12 C13 C19 C100 C101 C102 C103 C104 C105 C106 C107 C108: library part "Cap Pol1", "Polarized Capacitor (Radial)"
C20 C22: library part "Cap Pol3", "Polarized Capacitor (Surface Mount)"
C50 C53 C54: library part "Cap Semi", "Capacitor"
D1 D2: library part Diode, "Default Diode"
D3 D4 D100 D101 D102 D103 D104 D105 D106: library part 10BQ015, "Schottky Rectifier"
D9: library part "D Zener", "Zener Diode"
FU100: library part FUSE
J1 J2: library part "D Connector 9", "Receptacle Assembly, 9 Position, Right Angle"
JP1: library part MHDR2X13, "Header, 13-Pin, Dual row"
JP2 JP3 JP4 JP5 JP14: library part "Header 2", "Header, 2-Pin"
JP6 JP8: library part "Header 14H", "Header, 14-Pin, Right Angle"
JP7 JP11: library part "Header 5X2", "Header, 5-Pin, Dual row"
JP10: library part "Header 3", "Header, 3-Pin"
JP12 JP13: library part "Header 4", "Header, 4-Pin"
L1 L100 L101 L102: library part "Inductor Konstr 2", "Magnetic-Core Inductor"
Q1 Q11: library part GT122
Q2 Q4: library part GT109
Q3: library part BC847ALT1, "General Purpose Transistor NPN Silicon"
Q100 Q101: "HEXFET N-Channel Power MOSFET"
R1 R2 R3 R4 R5 R6 R7 R10 R11 R14 R15 R18 R19 R27 R28 R30 R34 R35 R36 R40 R41 R43 R46 R47 R48 R52 R53 R56 R57 R63 R64 R65 R72 R73 R79 R80 R81 R82 R89 R90 R97 R100 R101 R102 R103 R104 R105 R106 R107 R108 R109 R110: library part Res2, "Resistor"
S1 S2 S3 S4 S5: "Switch"
U4: "8-Channel Analog Multiplexer/Demultiplexer"
U6: "3-Terminal Low-Current Positive Fixed Voltage Regulator"
U10: "Precision Micropower, Low-Dropout, Voltage Reference"
U11: "Quadruple Operational Amplifier"
U14: "+5V Powered, Multi-Channel RS-232 Driver/Receiver"
U19 U20: library part LP2980AIM5-3.3, "Micropower SOT, 50 mA Ultra Low-Dropout Regulator"
U24: "ADC"
U100: "Self-Oscillating Half-Bridge Driver"
U101: library part L7805CT, "Positive Voltage Regulator"
U102: "Negative Voltage Regulator"
U103: library part C78L05CD, "CMOS Positive Voltage Regulator Very Low Drop-Very Low Quiescent"
X1 X2 X3 X4 X5 X6 X7 X8 X9 X10 X11 X12 X13 X14 X15 X16 X22 X23 X24 X25 X26 X27 X28 X29 X30 X31 X32 X33 X34 X35 X36 X37 X38 X39 X40 X41 X42 X43 X44 X45 X46 X47: library part Socket, "Socket"
Y1 Y3: library part XTAL, "Crystal Oscillator"

## Free pads (board coordinates)
  round 5 hole 3.2: 0(5.5,106.5) 0(5.5,4.5) 0(73.5,4.5) 0(73.5,106.5) 0(96.5,106.6) 0(96.5,4.6) 0(156,27.4) 0(156.05,11.6) 0(164.5,4.6) 0(164.5,106.6) 0(224.95,5) 0(225,31.7) 0(225,107.55) 0(225.05,60.05)
  round 3 hole 1.5: 0(106.95,51.5)
  round 2.5 hole 1.3: 1(110.75,55.8) 2(118.15,64.95) 3(103.1,46.95) 4(95.9,37.85)
  round 2 hole 1: 4(4.3,61.75) 9(4.3,57.6) 9(83.2,57.7) 9(83.2,61.85)

## Via types
v1: diameter 1.1, hole 0.6, Top Layer to Bottom Layer, 338 vias
v2: diameter 1.2, hole 0.7, Top Layer to Bottom Layer, 176 vias

## Nets (pads, with @x,y where several pads share a name; then routed paths per layer and width w, separated by ;. In a path a pad name is that pad's centre, name@x,y a point inside that pad or via, vN(x,y) a via of type N, cw(c..) or ccw(c..) an arc to the next point about the centre after c; other vN are vias at no path point)
485RX: JP4.3 JP6.6 | length 8
  Bottom Layer w0.5: JP6.6@60.92,2.76 59.65,4.03 59.65,6.15 61.42,7.92 JP4.3@61.42,9.5
485TX: JP4.2 JP6.5 | length 5.5
  Bottom Layer w0.5: JP6.5@60.92,5.3 63.96,8.34 JP4.2@63.96,9.5
+1V8: C14.2 C32.2 U1.17 U1.49 U1.63 U20.5 | length 51
  Top Layer w1: v1(51.4,88.9) 55.8,84.5 55.8,83.75 v1(52,79.95) ; v1(55.8,84.05) v1(65.5,84.05)
  Bottom Layer w0.25: U1.17@50.274,77.571 52,79.297 v1(52,79.95) ; v1(51.4,88.9) 51.4,89.303 U1.49@52.926,90.829 ; v1(55.8,84.05) 56.046,84.05 U1.63@57.876,85.879
  Bottom Layer w1: U20.5@65.4,104.45 65.4,84.15 v1(65.5,84.05)
+3V3: 
+3V3: C33.2 U1.7 U1.23 U1.43 U1.51 U17.5 X38.1 | length 95.2
  Top Layer w0.4: v1(51.65,75.75) 54.05,73.35 65.8,73.35 66.1,73.05 71,73.05 71.45,73.5 76.85,73.5 v1(76.9,73.45) ; v1@72.7,81.9 77.35,81.9 v1(78.15,81.1)
  Top Layer w1: v1(49.65,87.9) 50.4,87.9 51.225,87.075 52.95,85.35 52.95,83.75 51.2,82 v1@50.5,82 ; v1(50.5,82.05) 50.5,77.8 51.65,76.65 v1(51.65,75.75) v1@51.7,75.75
  Bottom Layer w0.25: U1.23@48.153,79.692 50.5,82.039 v1(50.5,82.05) ; U1.43@48.506,89.061 49.65,87.918 v1(49.65,87.9) ; v1@51,86.95 51.2,87.15 52.5,88.45 52.5,88.989 U1.51@53.633,90.122 ; v1@52.9,83.95 v1(52.911,83.95) U1.7@56.108,80.753
  Bottom Layer w0.4: U17.5@72.685,80.663 72.685,81.835 v1(72.75,81.9) ; v1(76.9,73.45) 77.9,74.45 77.9,80.85 v1(78.15,81.1)
  Bottom Layer w0.8: X38.1@48,53.6 48,59.7 51.65,63.35 v1(51.65,75.75)
  other v1: 51.25,87.1
+3V3_: C17.2 U15.1 U19.5 X41.1 | length 17.4
  Top Layer w0.5: v1(41.1,11.6) 42.2,10.5 53.15,10.5 53.85,9.8 v1(53.85,9.55)
  Bottom Layer w0.5: U15.1@38.8,11.605 41.095,11.605 v1(41.1,11.6) ; U19.5@53.1,10.55 53.1,10.3 v1(53.85,9.55)
+5V: C15.2 C20.1 C54.2 JP1.11 JP6.13 JP6.14 Q2.2 R27.1 R63.2 R72.2 R73.1 R89.2 R97.2 U2.19 U3.6 U4.16 U5.8 U7.6 U10.2 U11.4 U19.1 U19.3 U20.1 U20.3 U24.15 | length 430.8
  Top Layer w0.4: 40.7,105.6 40.7,105.75 ; 43.35,108.4 43.75,108.4 47.55,104.6 v1(47.55,103.95)
  Top Layer w0.5: v1(4.4,42.3) 4.45,42.3 4.45,41.6 4.55,41.5 v1(10.5,41.5) ; C54.2@8.75,39.75 8.775,39.775 8.775,41.475 ; 36.9,105.6 40.7,105.6 43.5,108.4 43.5,108.5 43.55,108.55 ; 43.6,108.4 43.6,110.35 43.65,110.35 ; v1(49.5,15.85) v1(54.05,15.85) ; v1(56.8,56.8) 71.5,56.8 72.9,55.4 72.9,54.25 74.4,52.75 74.75,52.75 74.797,52.703 R63.2@74.797,50.097 ; v1(56.9,62.45) 65.55,62.45 v1(65.6,62.4)
  Top Layer w0.6: R27.1@2.703,80.403 5.4,83.1 v1@15.85,83.1 ; v1(5.85,89.5) 16.1,89.5 16.25,89.35 27.05,89.35 v1(27.65,89.95)
  Top Layer w0.8: v1(49.5,28.1) 51.45,28.1 52.665,26.885 JP1.11@80.38,26.885
  Top Layer w1: v1(7.7,62.35) 7.75,62.3 7.8,62.35 56.8,62.35 v1(56.9,62.45) ; v1(12.25,106.2) 14.2,108.15 23.9,108.15 26.15,110.4 56.65,110.4 ; 56.7,110.4 59.55,110.4 v1(60.4,109.55) ; 58.2,110.4 63.6,110.4 v1(64.15,109.85)
  Bottom Layer w0.3: R72.2@46.45,105.25 R72.2@46.5,105.3
  Bottom Layer w0.4: R72.2@46.6,105.55 47.55,104.6 v1(47.55,103.95) ; U19.1@53.1,12.65 53.1,13.15 52.75,13.5 52.75,14.8 53.4,15.45 54.75,15.45 55.35,14.85 55.35,13.55 55.05,13.25 U19.3@55.05,12.7 ; U19.1@53.1,12.675 U19.1@53.1,12.85 ; v1@54.05,15.45 v1(54.05,15.85) ; U20.1@65.412,106.688 64.6,107.5 64.6,109.8 65.3,110.5 66.9,110.5 67.35,110.05 U20.3@67.35,106.725
  Bottom Layer w0.5: v1(4.4,42.3) 4.95,42.85 4.95,54.85 5.85,55.75 5.85,60.55 7.675,62.375 v1@7.7,62.4 ; 4.95,49.9 8.25,49.9 9.115,50.765 U3.6@10.6,50.765 ; U24.15@8.775,41.475 v1@10.525,41.475 ; v1(10.5,41.5) v1@10.6,41.4 ; v1(46.75,61.9) 46.8,61.9 47.075,62.175 47.075,62.595 ; U5.8@54.65,105.095 57.455,105.095 57.5,105.05 R73.1@57.55,105.1 ; U4.16@65.6,61.1 65.65,61.1 65.65,62.35 v1(65.6,62.4)
  Bottom Layer w0.6: 6.6,83.05 7.25,83.05 v1(7.3,83.1) ; v1(7.7,62.35) 7.7,61.6 9.15,60.15 10.5,60.15 10.865,60.515 U10.2@10.865,62.1 ; Q2.2@15.552,107.902 15.799,108.15 v1(17,108.15) ; v1@15.85,83.1 U11.4@17.625,83.1 ; v1(26.45,110.4) 26.5,110.35 R89.2@26.5,108.3 ; v1(27.65,89.95) 27.65,89.2 28.6,88.25 29.65,88.25 31.735,86.165 U7.6@31.735,85 ; v1@64.15,109.65 v1(64.15,109.85)
  Bottom Layer w1: v1(7.7,62.35) 7.675,62.375 6.7,63.35 6.7,88.35 5.6,89.45 5.6,97.3 12.25,103.95 v1(12.25,106.2) ; JP6.14@50.76,2.76 50.76,6.39 49.5,7.65 49.5,43.65 56.9,51.05 v1(56.9,62.45) ; U2.19@57.743,100.031 57.743,104.193 60.4,106.85 v1(60.4,109.55)
  other v1: 15.65,83.1
+5V_IZ: C27.2 C28.1 JP6.19 R47.1 R48.2 U14.16
+IAKB: 
+UOUT: JP1.4 JP6.1 JP6.2 R56.2 | length 80.8
  Bottom Layer w1: JP6.1@65.95,5.3 65.975,5.325 70.9,10.25 83.45,10.25 85.3,12.1 85.3,15.6 ; JP6.2@66,2.76 JP6.1@66,5.3 ; JP1.4@82.92,16.725 84.175,16.725 85.3,15.6 ; R56.2@86.45,64.9 86.45,16.75 85.3,15.6
-5V: C16.2 JP6.17 JP6.18 Q4.3 R90.1 | length 185.1
  Top Layer w0.6: v1(5.1,63.85) 5.15,63.8 7.5,63.8 v1(55.2,63.8) ; v1(10.75,110.35) v1(23.3,110.35)
  Bottom Layer w0.6: v1(5.1,63.85) 5.55,64.3 5.55,87.8 4.35,89 4.35,97.8 5.95,99.4 ; 5.75,99.2 10.75,104.2 v1(10.75,110.35) ; Q4.3@19.7,107.8 23.2,107.8 R90.1@23.7,108.3 23.7,109.95 v1(23.3,110.35) ; JP6.18@45.68,2.76 JP6.17@45.68,5.3 45.68,6.77 44.8,7.65 44.8,41.25 55.2,51.65 v1(55.2,63.8) ; v1(10.75,110.35) 10.7,110.4 v1(10.75,110.35)
-5V_IZ: C28.2 C30.2 JP6.20 U8.2 U14.15 U15.7 U16.2 X12.1 X14.1 | length 14.9
  Bottom Layer w0.4: v1(7.85,18.3) C30.2@9.8,18.3 ; C28.2@19.15,22.7 20.175,21.675 20.175,18.275 v1(19.45,17.55) ; v1(30.85,9.95) 31.235,10.335 U15.7@33.6,10.335 ; U8.2@33.6,14.965 35.735,14.965 v1(35.75,14.95) ; U16.2@33.6,20.665 35.585,20.665 v1(35.6,20.65)
-IAKB: 
-UOUT: JP1.21 JP6.3 JP6.4 | length 50.6
  Top Layer w0.8: JP1.21@80.38,39.585 JP1.21@80.38,39.6
  Top Layer w1: JP6.4@63.46,2.76 63.46,6.26 64.8,7.6 68.15,7.6 72.65,12.1 v1(74.45,12.1) ; v1@74.5,12.1 76.05,12.1 v1(76.1,12.05)
  Bottom Layer w1: v1(74.45,12.1) 76.95,12.1 78.3,13.45 78.3,38.45 79.435,39.585 JP1.21@80.38,39.585 ; v1@76.05,12.1 v1(76.1,12.05)
AD0: C11.2 R11.1 U24.7 | length 20.4
  Top Layer w0.5: v1(15.55,34.45) 17.3,34.45 18.897,36.047 18.897,36.303 ; v1(25.15,39.007) 27.493,39.007 C11.2@27.5,39
  Bottom Layer w0.5: v1(15.55,34.45) 16.225,35.125 21.225,35.125 25.107,39.007 R11.1@27.488,39.007
AD1: C24.2 R19.1 U24.6 | length 19
  Top Layer w0.5: v1(14.75,36.4) 14.847,36.303 15.897,36.303 ; v1(25.2,41.8) C24.2@27.45,41.8
  Bottom Layer w0.5: v1(14.75,36.4) 14.7,36.4 14.705,36.395 20.645,36.395 24.25,40 24.25,40.8 25.257,41.807 R19.1@27.488,41.807
AIN1: JP1.7 | length 9
  Top Layer w0.5: v1(73.7,23.8) 73.8,23.8 75.795,21.805 JP1.7@80.38,21.805
  Bottom Layer w0.4: 72.1,23.8 72.142,23.758 72.15,23.75
  Bottom Layer w0.5: 72.3,23.8 v1(73.7,23.8)
AIN1U: U4.13 | length 90.7
  Top Layer w0.5: 28.797,53.346 35.454,53.346 36.85,51.95 54.25,51.95 57.75,55.45 63.65,55.45 64,55.8 65.2,55.8 65.55,55.45 v1(68.75,55.45)
  Bottom Layer w0.5: v1@36.85,51.85 36.85,51.8 38.203,50.447 39.253,50.447 ; 66.6,26.45 66.6,23.95 66.7,23.85 69.25,23.85 69.25,25.85 70.9,27.5 70.9,39.75 67.75,42.9 67.75,51.2 68.05,51.5 68.05,53.15 67.75,53.45 67.75,54.8 68.575,55.625 69.465,56.515 U4.13@69.465,61.175
  other v1: 36.8,52
AIN2: JP1.13 R19.2 | length 63
  Top Layer w0.5: v1@73.775,29.425 JP1.13@80.38,29.425
  Top Layer w0.6: v1@33.3,29.45 33.325,29.425 v1@73.8,29.425 ; v1@73.75,29.4 v1@73.775,29.425
  Bottom Layer w0.4: 72.1,29.4 72.4,29.4
  Bottom Layer w0.5: R19.2@30.2,41.8 31,41.8 33.3,39.5 v1@33.3,29.45 ; 72.35,29.4 v1@73.75,29.4
  other v1: 73.85,29.4 33.25,29.75
AIN2U: U4.15 | length 36.2
  Bottom Layer w0.5: U4.15@66.925,61.175 66.925,57.175 65.8,56.05 65.8,53.25 65.5,52.95 65.5,51.45 65.8,51.15 65.8,40.05 65.25,39.5 65.25,33.35 66.6,32 66.6,29.4 69.5,29.4
AIN3: JP1.1 R7.2 | length 8.8
  Top Layer w0.5: v1(73.75,14.65) 74.215,14.185 JP1.1@80.38,14.185
  Bottom Layer w0.5: R7.2@72.1,15.4 73,15.4 v1(73.75,14.65)
AIN3U: C1.1 R6.1 R7.1 R30.1 U4.1 | length 109.2
  Top Layer w0.5: R30.1@28.85,50.5 30.4,52.05 34.95,52.05 36.2,50.8 37.35,50.8 37.55,51 54.85,51 58.5,54.65 64.45,54.65 v1(64.65,54.45) ; v1@41.85,50.6 v1(41.85,50.75) ; v1@62.3,15.35 62.325,15.375 v1(67.95,15.375)
  Bottom Layer w0.4: R6.1@66.2,15.35 R6.1@66.55,15.35 ; C1.1@66.55,12.75 R6.1@66.55,15.35 ; R7.1@69.25,15.4 69.275,15.375 R7.1@69.3,15.35 ; R7.1@69.45,15.4 69.45,15.45 69.4,15.4 R6.1@66.6,15.4 R6.1@66.55,15.35
  Bottom Layer w0.5: v1(41.85,50.75) 41.853,50.747 v1@41.853,50.447 ; v1@62.3,15.35 62.3,40.25 64.3,42.25 64.3,63.4 64.3,64.25 65.655,65.605 U4.1@65.655,67.025 ; C1.1@66.6,12.8 R6.1@66.6,15.4 66.625,15.375 R7.1@69.275,15.375 ; v1@67.9,15.4 67.925,15.375 v1(67.95,15.375)
  other v1: 62.2,15.35
AIN4: JP1.17 | length 8.1
  Top Layer w0.5: v1(73.95,34.5) 80.375,34.5 JP1.17@80.38,34.505
  Bottom Layer w0.5: 72.3,34.5 v1(73.95,34.5)
AIN4U: U4.14 | length 70.6
  Top Layer w0.5: 28.797,47.697 30.247,47.697 32.65,50.1 35.739,50.1 35.889,49.95 37.761,49.95 37.911,50.1 40.7,50.1 41.15,49.65 42.7,49.65 43.15,50.1 55.4,50.1 57.7,52.4 61.25,52.4 61.4,52.25 v1(66.7,52.25)
  Bottom Layer w0.4: 66.4,37.05 66.55,37.05
  Bottom Layer w0.5: U4.14@68.195,61.175 68.195,56.945 66.7,55.45 66.7,37.2 66.7,34.55 66.75,34.5 69.5,34.5
AIN5: JP1.5 | length 8.8
  Top Layer w0.5: v1@73.6,18.15 75.05,18.15 76.165,19.265 JP1.5@80.38,19.265
  Bottom Layer w0.5: 72.15,18.2 72.15,18.15 v1(73.65,18.15)
  Bottom Layer w0.6: 72.1,18.15 72.15,18.15
AIN5U: U4.12 | length 84.4
  Top Layer w0.4: v1@46.9,48.85 47.35,49.3 56,49.3 56.4,49.7 v1@71.4,49.7
  Top Layer w0.5: v1(46.85,48.85) v1@46.9,48.85 ; v1(67.95,18.25) 69.05,19.35 v1(74.55,19.35) ; v1@71.4,49.7 v1(71.55,49.85)
  Bottom Layer w0.5: 44.65,50.5 44.65,50.45 46.25,48.85 v1(46.85,48.85) ; 66.6,18.2 66.6,20.95 ; U4.12@70.7,61.1 70.7,56.35 71.6,55.45 71.6,44.7 75,41.3 75,19.8 v1(74.55,19.35) ; v1(71.55,49.85) v1@71.6,49.8
  Bottom Layer w0.6: 66.6,18.2 69.25,18.2 69.3,18.25 ; v1@67.95,18.2 v1(67.95,18.25)
AVAR: 
C0: 
DT1: JP1.15 R63.1 R64.1 | length 26
  Top Layer w0.5: R64.1@74.75,47.55 74.8,47.55 77.35,50.1 v1(77.6,50.1) ; v1(76.8,31.95) 76.815,31.965 JP1.15@80.38,31.965
  Bottom Layer w0.5: v1(76.8,31.95) 77.1,32.25 77.1,49.6 v1(77.6,50.1)
DT1U: C10.1 D9.2 R64.2 R65.2 U4.5 | length 36.2
  Top Layer w0.5: v1(70.7,69.05) v1(77.05,69.05) ; R64.2@77.503,47.503 80.147,47.503 80.15,47.5 80.2,47.55 R65.2@80.2,50.05
  Bottom Layer w0.5: U4.5@70.7,67 v1(70.7,69.05) ; v1(77.05,57.55) 77.088,57.588 v1@77.088,57.805 ; v1(77.05,69.05) 77.05,56.55 78.9,54.7 v1(78.9,47.503)
DT2: JP1.18 | length 31.3
  Top Layer w0.5: 74.8,55.4 v1(77.5,52.7) ; v1@76.1,33.3 76.15,33.25 81.675,33.25 JP1.18@82.925,34.5
  Bottom Layer w0.5: v1@76.1,33.3 76,33.3 76.2,33.5 76.2,51.4 v1(77.5,52.7)
  other v1: 76.05,33.3
DT2U: U4.2 | length 35.9
  Top Layer w0.5: v1(66.9,70.3) v1(78.35,70.3) ; 77.553,55.303 80.253,55.303 80.2,55.25 ; v1(79.85,57.85) 80.2,57.5 80.2,52.75
  Bottom Layer w0.5: U4.2@66.9,66.95 v1(66.9,70.3) ; v1(78.35,70.3) 78.3,70.25 78.3,59.4 v1(79.85,57.85)
GND: C1.2 C4.1 C10.2 C11.1 C14.1 C15.1 C16.1 C17.1 C19.2 C20.2 C21.1 C22.2 C23.1 C24.1 C31.1 C32.1 C33.1 C50.1 C53.1 C54.1 D9.1 JP1.3 JP1.12 JP1.26 JP4.1 JP6.15 JP6.16 pad.4@4.3,61.75 pad.9@83.2,57.7 pad.9@83.2,61.85 Q1.2 Q3.2 R6.2 R28.1 R36.1 R57.1 R65.1 U1.6 U1.18 U1.25 U1.42 U1.50 U1.58 U1.59 U2.1 U2.20 U3.3 U4.6 U4.7 U4.8 U5.4 U7.3 U8.7 U10.4 U11.11 U16.5 U16.7 U17.2 U19.2 U20.2 U24.10 U24.16 | length 22.4
  Bottom Layer w0.25: v1(46.4,91.15) 46.4,90.461 U1.42@48.153,88.708 ; U1.25@47.446,80.399 48.4,81.354 v1(48.4,82.15) ; v1(48.1,75.5) 48.1,76.104 U1.18@49.921,77.924 ; U1.50@53.279,90.476 54.75,91.946 v1(54.75,92.05) ; U1.58@56.108,87.647 57.211,88.75 v1@57.5,88.75 ; U1.6@56.461,81.106 58.918,78.65 v1(59.35,78.65) ; U1.59@56.5,87.3 57.55,88.35 v1@57.55,88.7 ; v1@57.5,88.7 v1@57.65,88.55
  Bottom Layer w0.4: U19.2@54.05,12.675 v2@54.05,14.1
  Bottom Layer w0.5: v2(66.05,109.05) 66.4,108.7 U20.2@66.4,106.725
  other v1: 78.35,2.5 82.5,2.5 80,5 85,5 78,7.5 82.5,7.5 86.15,9.55 85,68.25 85,72.5 57.8,88.8 81.9,98.4
  other v2: 68.45,1.7 55.65,8.05 43.4,9.25 69.1,11.4 43.35,11.75 60.05,11.85 54.05,14.25 43.4,14.4 76.5,15.95 42.5,16.6 54.8,18.2 40.8,20.55 73.6,21.75 70.6,21.85 47.5,23.1 54.9,23.35 76.5,23.7 40.05,25.05 47.5,28.05 42.5,28.1 76.5,28.2 54.8,30.7 1.8,31.1 32,31.3 11.2,32.75 3.8,33.4 13.9,34.8 54.65,34.9 42.5,35 47.5,35 32.15,35.15 6.2,36.2 11.3,39.75 64.15,40.3 68.05,40.6 78.5,40.9 72.6,40.95 1.9,41 20.8,41.15 57.5,41.4 52.5,41.7 42.5,42.5 8.6,44.1 72.95,45.85 22.95,46.05 2.1,46.4 60.95,47.2 46.55,47.3 31.35,55.1 46.7,55.35 49.4,55.35 43.95,55.4 7.55,57.5 15.05,57.55 74.95,57.55 72.45,58.75 13,59.55 44.05,59.6 2.5,60 17.5,60 38.95,60.1 67.55,63.15 80,63.35 2.5,65 15,65.05 55.5,65.4 12.5,67.5 17.05,67.5 49.1,68.6 15.05,69.5 57.6,70.1 10,72.5 32.6,74.2 61.7,74.4 2.5,75 10,77.5 61.75,78.3 25.2,78.8 39,80 85,80 29,80.2 29,82.95 25.2,83.1 47.15,84.05 49.95,84.1 2.5,85 85,85 8.25,85.05 39.35,85.9 42.35,86.1 10,87.5 72.5,87.5 77.5,87.5 82.55,87.5 2.5,90 75,90 85,90 18.15,90.7 7.5,90.95 34.7,90.95 22.5,91.45 27.5,91.55 59.7,92.05 72.5,92.5 77.5,92.5 82.5,92.5 51.55,92.65 44.9,94.65 2.5,95 75,95 85,95 10.35,97.95 74.15,98.95 2.5,100 70,100 86.4,100 80,101.35 67.5,102.55 55.75,102.95 26.35,103.7 60,103.9 63.4,104 32.2,104.35 86.55,104.4 81.3,104.9 16.65,105 29.1,108.45 51.05,108.5 69.2,109.95 82.5,110 86.45,110
I1: 
I1+: JP1.6 R11.2 | length 77.5
  Top Layer w0.5: v1(31.95,39.05) 32,39 v1(61.15,39) ; v1(60,16.85) 75,16.85 76.15,18 81.655,18 JP1.6@82.92,19.265
  Bottom Layer w0.5: R11.2@30.3,39.05 v1(31.95,39.05) ; v1(60,16.85) 60.25,17.1 60.25,32.45 60.1,32.6 60.1,34.25 61.15,35.3 v1(61.15,39)
I1-: JP1.2 R15.2 R18.2 | length 76.1
  Top Layer w0.6: v1(32,33.4) 61.1,33.4 v1(61.2,33.3) ; v1(61.85,13.3) 77.6,13.3 78.25,12.65 81.385,12.65 JP1.2@82.92,14.185
  Bottom Layer w0.5: R15.2@30.288,36.207 30.35,36.144 30.35,33.4 v1(32,33.4) ; v1(61.2,33.3) 61.2,16.1 61.1,16 61.1,14.05 v1(61.85,13.3)
LO1: JP1.8 U11.1 | length 114.8
  Top Layer w0.5: v1(34.4,30.65) 50.95,30.65 v1(51,30.6) ; v1(52.35,20.55) 81.665,20.55 JP1.8@82.92,21.805
  Bottom Layer w0.5: U11.1@17.7,79.3 19.05,79.3 22.35,76 22.35,52.65 34.4,40.6 v1(34.4,30.65) ; v1(51,30.6) 51,26.6 52.45,25.15 52.45,20.65 v1(52.35,20.55)
LO2: JP1.10 U11.7 | length 116.8
  Top Layer w0.5: v1(35.55,34.6) v1(40.25,34.6) ; v1(40.25,26.8) 51.05,26.8 52.25,25.6 81.665,25.6 JP1.10@82.92,24.345
  Bottom Layer w0.5: U11.7@17.625,86.91 19.09,86.91 19.85,86.15 19.85,79.9 23.4,76.35 23.4,53 35.6,40.8 v1@35.6,34.6 ; v1(40.25,26.8) v1(40.25,34.6)
LO3: JP1.19 U11.8 | length 100.3
  Top Layer w0.5: v1(37.95,37.6) 38.25,37.3 77.65,37.3 77.905,37.045 JP1.19@80.38,37.045
  Bottom Layer w0.5: U11.8@22.975,86.91 25.14,86.91 26.4,85.65 26.4,77.6 25.35,76.55 25.35,53.8 37.65,41.5 37.65,37.9 v1(37.95,37.6)
LO4: JP1.20 U11.14 | length 95.4
  Top Layer w0.45: 79.55,35.8 81.7,35.8 JP1.20@82.9,37
  Top Layer w0.5: v1(36.85,36.4) 77.25,36.4 77.85,35.8 79.55,35.8
  Bottom Layer w0.5: U11.14@22.975,79.29 24.35,77.915 24.35,53.4 36.65,41.1 36.65,36.6 v1(36.85,36.4)
LO5: JP1.24 | length 72.5
  Top Layer w0.4: v1(41.65,60.75) 41.7,60.7 v1(51.75,60.7) ; v1(44.95,43.3) 53.4,43.3 54.2,42.5 55.3,42.5 55.35,42.55 68,42.55 68.6,41.95 71.05,41.95 72.5,43.4 81.645,43.4 JP1.24@82.92,42.125
  Bottom Layer w0.4: v1(41.65,60.75) 41.7,60.8 41.7,62.6 ; v1(44.95,43.3) 44.95,44.95 45.65,45.65 46.6,45.65 51.75,50.8 v1(51.75,60.7)
LO6: JP1.25 | length 66.3
  Top Layer w0.4: v1(46.15,44.5) 46.45,44.8 46.6,44.65 80.3,44.65 JP1.25@80.35,44.7 ; v1@49.85,65.05 53.9,65.05 v1(53.85,65.1)
  Bottom Layer w0.4: v1(46.15,44.5) 46.55,44.5 54.4,52.35 54.4,63 53.85,63.55 v1(53.85,65.1) ; 47.075,63.865 48.665,63.865 v1@49.85,65.05
  other v1: 49.65,65.05
NetA1_1: A1.1 Q1.3 | length 10.5
  Top Layer w0.5: A1.1@76.2,99.9 v1(83.9,99.9)
  Bottom Layer w0.4: v1(83.9,99.9) 84,100 Q1.3@84,102.65
NetA1_2: A1.2 C19.1 R56.1 R57.2 | length 25.1
  Top Layer w0.4: v1(76.85,77.3) v1(83.15,77.3)
  Bottom Layer w0.4: v1(76.85,77.3) A1.2@76.85,84.3 ; v1(83.15,77.3) 83.2,77.25 R57.2@83.2,75.2 ; R57.2@83.25,75.2 R57.2@83.2,75.2 ; R56.1@83.3,65.6 83.3,70.35 83.3,75.1 83.225,75.175 R57.2@83.2,75.2
NetC4_2: C4.2 R18.1 U24.11 | length 22.9
  Top Layer w0.5: v1(25.2,33.407) C4.2@27.512,33.407
  Bottom Layer w0.5: U24.11@8.775,36.395 10.105,36.395 13.9,32.6 24.15,32.6 24.957,33.407 R18.1@27.488,33.407
NetC5_1: C5.1 C102.1 JP8.13 JP8.14 U9.1 U101.3 | length 127.4
  Top Layer w0.4: U9.1@129.6,95 129.6,89.5 130.85,88.25 158.7,88.25 159,88.55 ; v1(149.45,73.8) 148.45,72.8 148.45,48.65 v1(149.55,47.55)
  Top Layer w1: JP8.14@141.76,2.86 141.76,5.31 141.76,7.16 143.25,8.65 143.25,16.85 U101.3@143.4,17
  Bottom Layer w0.5: U101.3@143.3,16.96 143.3,19.4 145.25,21.35 146.25,21.35 150.65,25.75 150.65,46.45 v1(149.55,47.55) ; v1(147.6,88.25) 147.6,78.35 149.45,76.5 v1(149.45,73.8)
NetC5_2: C5.2 C101.2 C102.2 C104.1 C105.1 C109.1 JP8.15 JP8.16 T100.4 T100.5 U9.2 U9.4 U9.8 U101.2 U102.5 | length 154.3
  Top Layer w0.4: U9.8@138.45,94.85 138.6,94.7 v1(148.95,94.7) ; v1(148.95,83.45) 157.85,83.45 158.35,82.95 159.25,83.85 162.3,83.85 164.5,86.05 169.05,86.05 172.5,82.6 172.57,82.53 172.57,78.1 ; v1(150.55,72.05) 149.25,70.75 149.25,50.05 v1(151.55,47.75)
  Top Layer w0.6: U9.2@130.825,94.975 130.825,96.825 132.85,98.85 v1(149.15,98.85) ; C5.2@132.7,91.5 133.35,92.15 133.35,98.65 133.55,98.85
  Bottom Layer w0.5: U101.2@145.8,19.5 151.6,25.3 151.6,47.7 v1(151.55,47.75) ; v1(148.95,94.7) 148.9,94.65 148.9,78.55 150.55,76.9 v1(150.55,72.05)
  Bottom Layer w0.6: v1(148.95,94.7) 148.95,98.65 v1(149.15,98.85)
NetC12_1: C12.1 L1.2 U6.8 | length 11.1
  Top Layer w1: C12.1@109.95,97.85 109.95,100.8 110.807,101.657 L1.2@110.807,101.668 ; 110.05,99.8 116.65,99.8 U6.8@116.85,100
NetC12_2: C12.2 C13.2 JP7.5 JP7.6 U6.2 U6.3 U6.6 U6.7 U9.9 U9.15 X2.1 X16.1 | length 100.2
  Top Layer w0.5: U6.7@116.8,101.465 U6.6@116.8,102.735 ; 116.8,102.2 116.9,102.1 ; U6.6@116.8,102.75 U6.6@116.85,102.8 ; U6.2@122,101.465 U6.3@122,102.7 ; 130.825,102.2 U9.15@130.825,104.225 ; U9.9@138.445,104.1 U9.9@138.445,104.225 ; U9.9@138.45,104.25 156.05,104.25 160.2,100.1 172.35,100.1 172.43,100.02 JP7.5@174.9,100.02
  Top Layer w0.8: X2.1@101.6,92.6 104.65,92.6 105.6,91.65 C13.2@122.9,91.65 ; 116.8,102.2 137.95,102.2 138.7,102.95 U9.9@138.7,104.1 ; 119.35,102.2 119.35,95.2 C13.2@122.9,91.65 ; C13.2@122.95,91.7 C13.2@122.9,91.65
NetC13_1: C13.1 U6.1 U9.16 | length 15.7
  Top Layer w1: U6.1@122,100.195 122.8,99.395 C13.1@122.8,97.7 ; 122.756,99.439 123.539,99.439 124.15,100.05 v1(124.05,100.05) ; v1(124.1,105.05) 124.15,105.1 128.8,105.1 129.3,104.6 129.3,104 U9.16@129.35,103.95
  Bottom Layer w1: v1(124.05,100.05) 124.05,105 v1(124.1,105.05)
NetC21_2: C21.2 U1.61 Y1.1 | length 11.7
  Bottom Layer w0.25: U1.61@57.168,86.586 57.882,87.3 59.5,87.3 60.6,88.4 60.6,89.45 62,90.85 C21.2@62,95.35
NetC23_2: C23.2 R15.1 U24.8 | length 12.9
  Top Layer w0.5: v1(25.1,36.207) 25.143,36.25 C23.2@27.5,36.25
  Bottom Layer w0.5: U24.8@18.025,33.855 22.705,33.855 25.057,36.207 R15.1@27.488,36.207 ; v1@25.1,36.15 v1(25.1,36.207)
NetC26_1: C26.1 U14.3 | length 3.5
  Bottom Layer w0.4: U14.3@18.905,14.3 18.905,12.845 20,11.75 C26.1@20,11.25
NetC26_2: C26.2 U14.1 | length 3.7
  Bottom Layer w0.4: U14.1@21.445,14.3 21.445,12.505 C26.2@22.8,11.15
NetC27_1: C27.1 U14.2 | length 5.8
  Bottom Layer w0.4: U14.2@20.175,14.3 20.175,15.725 20.45,16 22.4,16 23.2,15.2 C27.1@24.1,15.2
NetC29_1: C29.1 U14.4 | length 3.1
  Bottom Layer w0.4: C29.1@17.6,11.25 17.635,11.285 U14.4@17.635,14.3
NetC29_2: C29.2 U14.5 | length 3.7
  Bottom Layer w0.4: C29.2@14.8,11.2 16.365,12.765 U14.5@16.365,14.3
NetC30_1: C30.1 U14.6 | length 7.8
  Bottom Layer w0.4: C30.1@9.8,15.6 10.65,16.45 15.09,16.45 15.095,16.445 U14.6@15.095,14.3
NetC31_2: C31.2 U1.62 Y1.2 | length 6.4
  Bottom Layer w0.25: U1.62@57.522,86.233 58.139,86.85 59.8,86.85 60.85,87.9 C31.2@61.95,87.9 ; C31.2@62,87.9 Y1.2@62,89.15
NetC34_1: C34.1 D2.1 JP5.1 Q11.2 R79.1 S1.1 S2.1 S3.1 S4.1 S5.1
  other v2: 173.15,39.4 177.201,39.4 180.501,39.45 173.101,43.2 177.2,43.2 180.55,43.2 191.85,44